# Altium PCB BigCreteCANV1.PcbDoc
Units mil, origin at the board's own origin, x right, y up, seen from the top; angles counter-clockwise.
Board outline 6000 x 4000 mil, 2 copper layers (Top Layer, Bottom Layer); 47 components, 32 nets, 163 pads, 0 vias.
Unrouted connection lines stored in the file: 100.
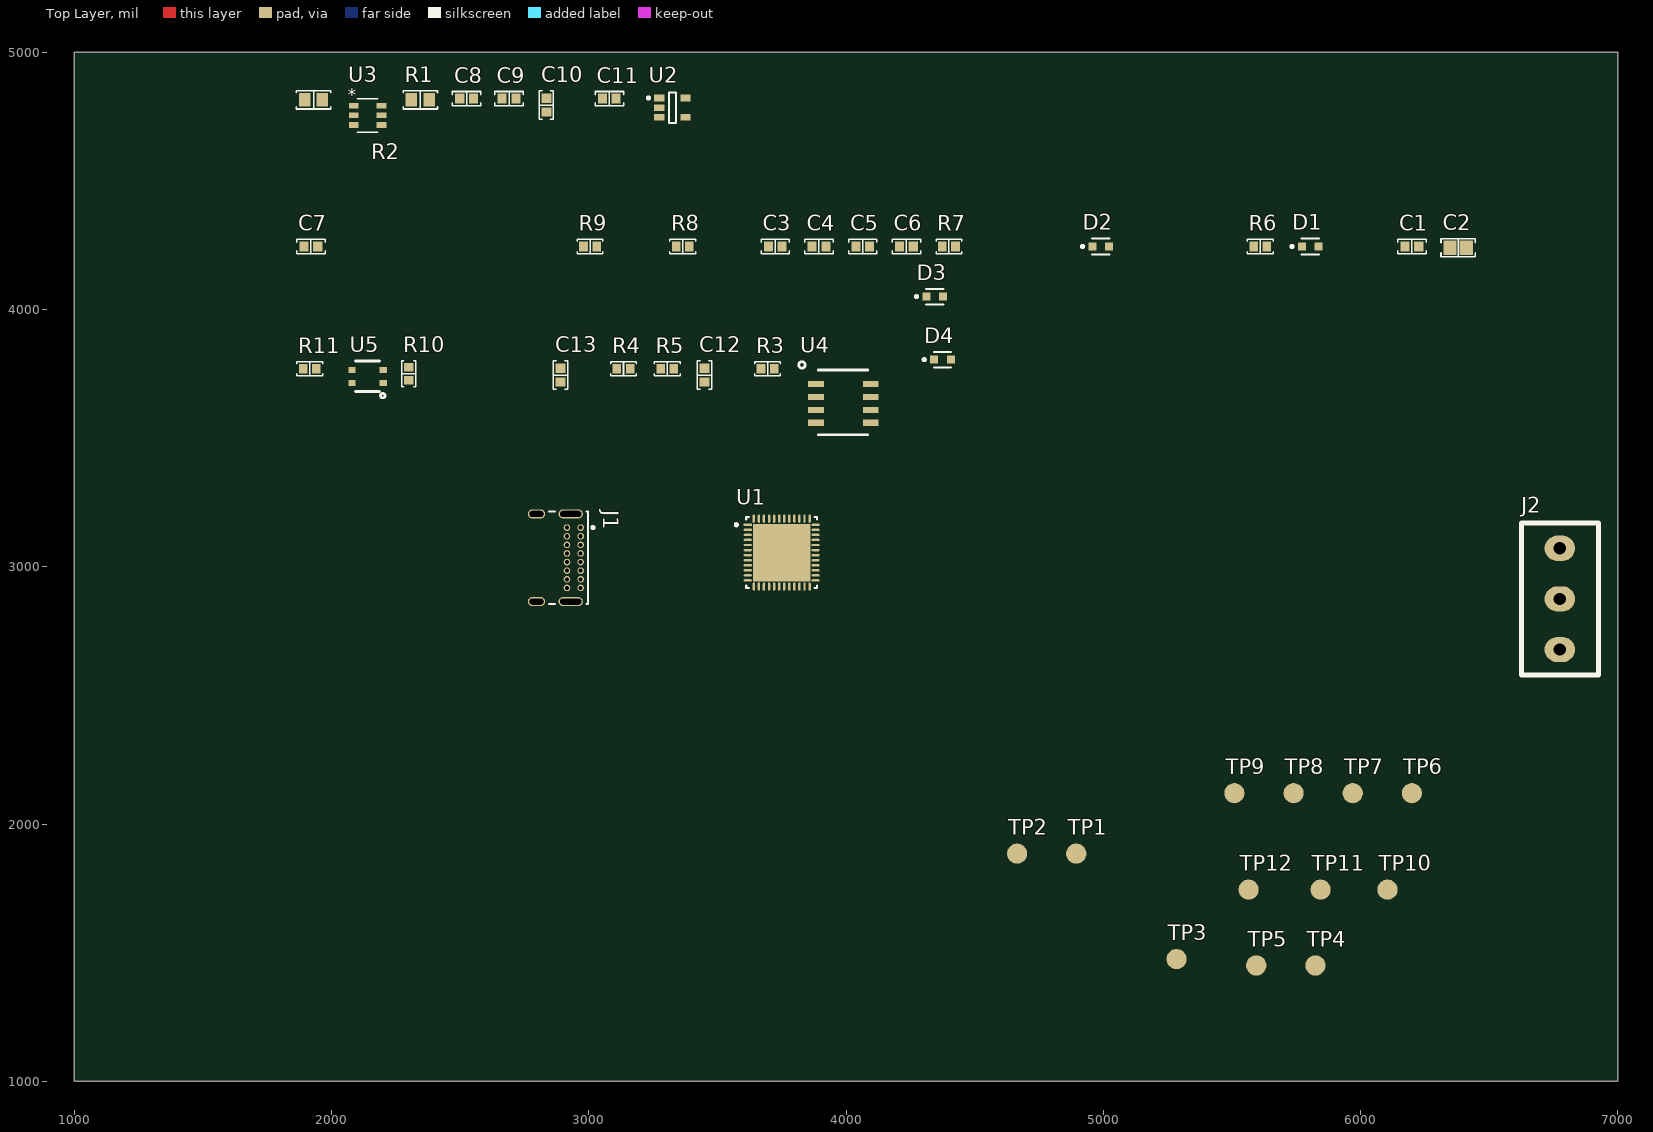
[diagram p0: Top Layer view]
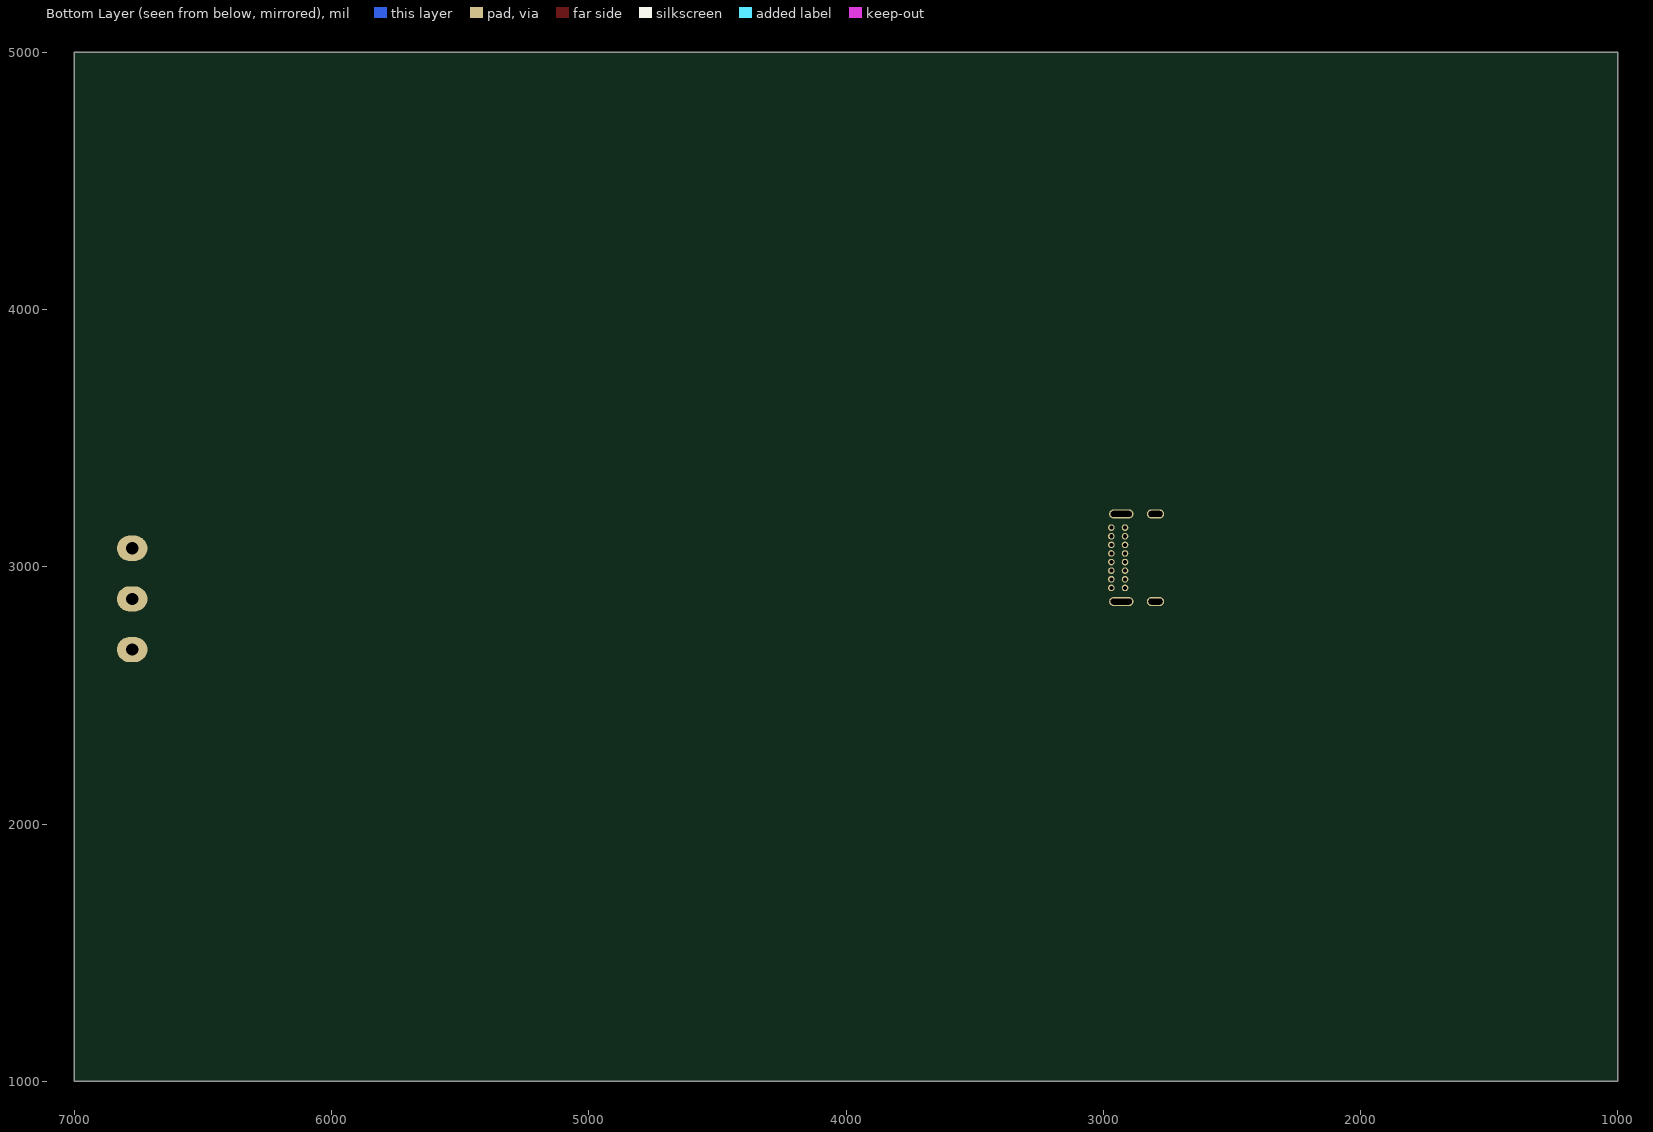
[diagram p1: Bottom Layer view, seen from below]

## Layer stack, top to bottom
Top Solder: solder mask 0.4, Solder Resist, Dk 3.5
Top Layer: signal copper 1.4
Dielectric 1: dielectric 12.6, FR-4, Dk 4.8
Bottom Layer: signal copper 1.4
Bottom Solder: solder mask 0.4, Solder Resist, Dk 3.5

## Board outline
1000,1000 7000,1000 7000,5000 1000,5000

## Design rules (kind name [scope] priority, off if disabled: settings)
Clearance [All] p1: gap=10 ignorepadtopadclearanceinfootprint=TRUE except(0: Arc-Hole Track-Hole SMDPad-Hole THPad-Hole Via-Hole Fill-Hole Poly-Hole Region-Hole Text-Hole)
PolygonConnect [All] p1: connectstyle=Relief reliefconductorwidth=10 reliefentries=4 polygonreliefangle="90 Angle" airgapwidth=10
RoutingVias [All] p1: holewidth=28 width=50 viastyle="Through Hole" minholewidth=28 minwidth=50 maxholewidth=28 maxwidth=50
SolderMaskExpansion [All] p1: expansion=4 istentingtop=FALSE
Width [All] p1: maxlimit=10 minlimit=10 preferedwidth=10
30 further rules are at their usual default settings.

## Classes and differential pairs
component class Power_Conn: C8 C9 C10 C11 J1 R1 R2 U2 U3
component class Microcontroller: C1 C2 C3 C4 C5 C6 C7 D1 D2 D3 D4 R6 R7 R8 R9 TP1 TP2 TP3 TP4 TP5 TP6 TP7 TP8 TP9 U1
component class CAN: C12 C13 J2 R3 R4 R5 R10 R11 TP10 TP11 TP12 U4 U5

## Components (designator, comment, footprint, x,y, rotation, side; value= is the part's Value field where it differs from the comment)
C1 "1 µF" "CAP 0603_1608" 6200,4245 r0 top
C2 "10 µF" "CAP 0805_2012" 6380,4240 r0 top
C3 "0.1 µF" "CAP 0603_1608" 3725,4245 r0 top
C4 "0.1 µF" "CAP 0603_1608" 3895,4245 r0 top
C5 "0.1 µF" "CAP 0603_1608" 4065,4245 r0 top
C6 "0.1 µF" "CAP 0603_1608" 4235,4245 r0 top
C7 "0.1 µF" "CAP 0603_1608" 1920,4245 r0 top
C8 "0.1 µF" "CAP 0603_1608" 2525,4820 r0 top
C9 "1 µF" "CAP 0603_1608" 2690,4820 r0 top
C10 "1 µF" "CAP 0603_1608" 2835,4795 r90 top
C11 "0.1 µF" "CAP 0603_1608" 3080,4820 r0 top
C12 "0.1 µF" "CAP 0603_1608" 3450,3745 r90 top
C13 "0.1 µF" "CAP 0603_1608" 2890,3745 r90 top
D1 "SML-D12U1WT86" FP-SML-D12-MFG 5805,4245 r0 top
D2 "SML-D12U1WT86" FP-SML-D12-MFG 4990,4245 r0 top
D3 "SML-D12U1WT86" FP-SML-D12-MFG 4345,4050 r0 top
D4 "SML-D12U1WT86" FP-SML-D12-MFG 4375,3805 r0 top
J1 "USB4085-GF-A" FP-USB4085-GF-A-MFG 2810,3035 r270 top
J2 "EBBA-03-C-SS-BU" EBBA-03-C-SS-BU 6775,2875 r90 top
R1 "5.1 kOhms" "RES 0805_2012" 2345,4815 r0 top
R2 "5.1 kOhms" "RES 0805_2012" 1930,4815 r0 top
R3 "0 Ohms" "RES 0603_1608" 3695,3770 r0 top
R4 "0 Ohms" "RES 0603_1608" 3135,3770 r0 top
R5 "0 Ohms" "RES 0603_1608" 3305,3770 r0 top
R6 "330 Ohms" "RES 0603_1608" 5610,4245 r0 top
R7 "330 Ohms" "RES 0603_1608" 4400,4245 r0 top
R8 "330 Ohms" "RES 0603_1608" 3365,4245 r0 top
R9 "330 Ohms" "RES 0603_1608" 3005,4245 r0 top
R10 "330 Ohms" "RES 0603_1608" 2300,3750 r90 top
R11 "110 Ohms" "RES 0603_1608" 1915,3770 r0 top
TP1 "test_pad" "2mm TP" 4895,1885 r0 top
TP2 "test_pad" "2mm TP" 4665,1885 r0 top
TP3 "test_pad" "2mm TP" 5285,1475 r0 top
TP4 "test_pad" "2mm TP" 5825,1450 r0 top
TP5 "test_pad" "2mm TP" 5595,1450 r0 top
TP6 "test_pad" "2mm TP" 6200,2120 r0 top
TP7 "test_pad" "2mm TP" 5970,2120 r0 top
TP8 "test_pad" "2mm TP" 5740,2120 r0 top
TP9 "test_pad" "2mm TP" 5510,2120 r0 top
TP10 "test_pad" "2mm TP" 6105,1745 r90 top
TP11 "test_pad" "2mm TP" 5845,1745 r90 top
TP12 "test_pad" "2mm TP" 5565,1745 r90 top
U1 "STM32G474CEU6" FP-UFQFPN48-A0B9-IPC_C 3750,3055 r0 top
U2 "MIC5504-3.3YM5-TR" FP-SOT23-5LD-PL-1-MFG 3325,4785 r0 top
U3 "USBLC6-2SC6" SOT23-6L_STM 2140,4755 r0 top
U4 "TCAN1057AEV" TCAN1057AEV 3990,3635 r0 top
U5 "TLP3317" TLP3317 2140,3740 r0 top

## Footprints (in the part's own frame and the unit in brackets; to place one, negate y for a bottom-side part, rotate by r counter-clockwise, add the part's x,y. Pads: shape width x height; smd on the part's side, far side on the other; paste and mask are expansions set on the pad)
"2mm TP" [mm]
  round 2 smd: 1(0,0)
"CAP 0603_1608" [mm] "Chip Capacitor, 2-Leads, Body 1.60x0.80mm, IPC Medium Density"
  rect 0.9x1 smd: 1(-0.675,0) 2(0.675,0)
  silkscreen extent -1.4,-0.7 1.4,0.7, body extent -0.8,-0.41 0.8,0.41, height 0.82
"CAP 0805_2012" [mm] "Chip Capacitor, 2-Leads, Body 2.00x1.20mm, IPC Medium Density"
  rect 1.3x1.4 smd: 1(-0.8,0) 2(0.8,0)
  silkscreen extent -1.7,-0.9 1.7,0.9, body extent -1,-0.64 1,0.64, height 1.26
EBBA-03-C-SS-BU [mm] "3 pos screw terminal"
  oval 2.5x3 hole 1.2: 1(-5,0) 2(0,0) 3(5,0)
  silkscreen extent -7.5,-3.8 7.5,3.8
FP-SML-D12-MFG [mm]
  rect 0.8x0.8 smd paste+0 mask+0: 1(-0.825,0) 2(0.825,0)
  silkscreen extent -1.92,-0.79 0.85,0.77, body extent -1.33,-0.55 1.33,0.55, height 0.25
FP-SOT23-5LD-PL-1-MFG [mm]
  rect 1x0.66 smd paste+0 mask+0: 1(-1.3,0.95) 2(-1.3,0) 3(-1.3,-0.95) 4(1.3,-0.95) 5(1.3,0.95)
  silkscreen extent -2.47,-1.5 0.35,1.5, body extent -1.9,-1.6 1.9,1.6, height 0.25
FP-UFQFPN48-A0B9-IPC_C [mm]
  rect 0.81x0.242 smd paste+0 mask+0: 1(-3.351,2.75)
  rrect100% 0.81x0.242 smd paste+0 mask+0: 2(-3.351,2.25) 3(-3.351,1.75) 4(-3.351,1.25) 5(-3.351,0.75) 6(-3.351,0.25) 7(-3.351,-0.25) 8(-3.351,-0.75) 9(-3.351,-1.25) 10(-3.351,-1.75) 11(-3.351,-2.25) 12(-3.351,-2.75) 25(3.351,-2.75) 26(3.351,-2.25) 27(3.351,-1.75) 28(3.351,-1.25) 29(3.351,-0.75) 30(3.351,-0.25) 31(3.351,0.25) 32(3.351,0.75) 33(3.351,1.25) 34(3.351,1.75) 35(3.351,2.25) 36(3.351,2.75)
  rrect100% 0.242x0.81 smd paste+0 mask+0: 13(-2.75,-3.351) 14(-2.25,-3.351) 15(-1.75,-3.351) 16(-1.25,-3.351) 17(-0.75,-3.351) 18(-0.25,-3.351) 19(0.25,-3.351) 20(0.75,-3.351) 21(1.25,-3.351) 22(1.75,-3.351) 23(2.25,-3.351) 24(2.75,-3.351) 37(2.75,3.351) 38(2.25,3.351) 39(1.75,3.351) 40(1.25,3.351) 41(0.75,3.351) 42(0.25,3.351) 43(-0.25,3.351) 44(-0.75,3.351) 45(-1.25,3.351) 46(-1.75,3.351) 47(-2.25,3.351) 48(-2.75,3.351)
  rect 5.7x5.7 smd paste-1000 mask+0: 49(0,0)
  silkscreen extent -4.61,-3.5 3.5,3.5, body extent -3.86,-3.86 3.86,3.86, height 0.25
FP-USB4085-GF-A-MFG [mm]
  rrect100% 0.9x2.4 hole 2.1 slot 0.6 at 0 deg paste-1000 mask+0: 1(-4.325,3.045) 2(4.325,3.045)
  rrect100% 0.9x1.7 hole 1.4 slot 0.6 at 0 deg paste-1000 mask+0: 3(-4.325,-0.335) 4(4.325,-0.335)
  round 0.65 hole 0.4 paste-1000 mask+0: A1(-2.975,4.025) A4(-2.125,4.025) A5(-1.275,4.025) A6(-0.425,4.025) A7(0.425,4.025) A8(1.275,4.025) A9(2.125,4.025) A12(2.975,4.025) B1(2.975,2.675) B4(2.125,2.675) B5(1.275,2.675) B6(0.425,2.675) B7(-0.425,2.675) B8(-1.275,2.675) B9(-2.125,2.675) B12(-2.975,2.675)
  silkscreen extent -4.57,0.89 4.57,5.37, body extent -4.87,-4.83 4.87,4.83, height 0.25
"RES 0603_1608" [mm] "Chip Resistor, 2-Leads, Body 1.60x0.80mm, IPC Medium Density"
  rect 0.85x0.95 smd: 1(-0.65,0) 2(0.65,0)
  silkscreen extent -1.27,-0.7 1.27,0.7, body extent -0.8,-0.4 0.8,0.4, height 0.45
"RES 0805_2012" [mm] "Chip Resistor, 2-Leads, Body 2.00x1.25mm, IPC Medium Density"
  rect 1.15x1.35 smd: 1(-0.875,0) 2(0.875,0)
  silkscreen extent -1.7,-0.9 1.7,0.9, body extent -1,-0.62 1,0.63, height 0.6
SOT23-6L_STM [mil]
  rect 38.5x22 smd paste+0 mask+0: 1(-53.75,37.4) 2(-53.75,0) 3(-53.75,-37.4) 4(53.75,-37.4) 5(53.75,0) 6(53.75,37.4)
  silkscreen extent -40,-65 40,65, body extent -59,-60 59,60, height 57
TCAN1057AEV [mm]
  rect 1.55x0.6 smd: 1(-2.7,1.905) 2(-2.7,0.635) 3(-2.7,-0.635) 4(-2.7,-1.905) 5(2.7,-1.905) 6(2.7,-0.635) 7(2.7,0.635) 8(2.7,1.905)
  silkscreen extent -4.42,-3.1 2.4,4.12
TLP3317 [mm]
  rect 0.7x0.6 smd: 1(1.55,-0.635) 2(1.55,0.635) 3(-1.55,0.635) 4(-1.55,-0.635)
  silkscreen extent -1.2,-2.12 1.72,1.5

## Part data
C1 C9 C10: library part CL10B105KP8NFNC, "CAP CER 1UF 10V X7R 0603", Device Package="0603 (1608 Metric)", Manufacturer="Samsung Electro-Mechanics", Operating Temperature="-55°C ~ 125°C", Supplier Part Number 1=1276-1945-1-ND, Temperature Coefficient=X7R, Tolerance=±10%, Voltage - Rated=10V, Applications="General Purpose", Capacitance="1 µF", ComponentLink1Description=Datasheet, ComponentLink1URL=http://www.samsungsem.com/kr/support/product-search/mlcc/CL10B105KP8NFNC.jsp, ComponentLink2Description="DigiKey Link", ComponentLink2URL=https://www.digikey.com/en/products/detail/samsung-electro-mechanics/CL10B105KP8NFNC/3887603, LastUpdated="2023-11-08 8:08:57 PM", Lifecycle Status=Active, Minimum Order=1, Mounting Type="Surface Mount, MLCC", Package / Case="0603 (1608 Metric)", Packaging=TapeAndReel, Part Number=CL10B105KP8NFNC, Part Status=Active, PartId=10019, Price=0.01, Series=CL, Size / Dimension="0.063\" L x 0.031\" W (1.60mm x 0.80mm)", Supplier 1=DigiKey, Thickness (Max)="0.035\" (0.90mm)"
C2: library part CL21A106KOQNNNE, "CAP CER 10UF 16V X5R 0805", Device Package="0805 (2012 Metric)", Manufacturer="Samsung Electro-Mechanics", Operating Temperature="-55°C ~ 85°C", Supplier Part Number 1=1276-1096-1-ND, Temperature Coefficient=X5R, Tolerance=±10%, Voltage - Rated=16V, Applications="General Purpose", Capacitance="10 µF", ComponentLink1Description=Datasheet, ComponentLink1URL=http://www.samsungsem.com/kr/support/product-search/mlcc/CL21A106KOQNNNE.jsp, ComponentLink2Description="DigiKey Link", ComponentLink2URL=https://www.digikey.com/en/products/detail/samsung-electro-mechanics/CL21A106KOQNNNE/3886754, LastUpdated="2023-11-08 8:12:18 PM", Lifecycle Status=Active, Minimum Order=1, Mounting Type="Surface Mount, MLCC", Package / Case="0805 (2012 Metric)", Packaging=TapeAndReel, Part Number=CL21A106KOQNNNE, Part Status=Active, PartId=14297, Price=0.01, Series=CL, Size / Dimension="0.079\" L x 0.049\" W (2.00mm x 1.25mm)", Supplier 1=DigiKey, Thickness (Max)="0.055\" (1.40mm)"
C3 C4 C5 C6 C7 C8 C11 C12 C13: library part CL10B104KB8NNNC, "CAP CER 0.1UF 50V X7R 0603", Device Package="0603 (1608 Metric)", Manufacturer="Samsung Electro-Mechanics", Operating Temperature="-55°C ~ 125°C", Supplier Part Number 1=1276-1000-1-ND, Temperature Coefficient=X7R, Tolerance=±10%, Voltage - Rated=50V, Applications="General Purpose", Capacitance="0.1 µF", ComponentLink1Description=Datasheet, ComponentLink1URL=http://www.samsungsem.com/kr/support/product-search/mlcc/CL10B104KB8NNNC.jsp, ComponentLink2Description="DigiKey Link", ComponentLink2URL=https://www.digikey.com/en/products/detail/samsung-electro-mechanics/CL10B104KB8NNNC/3886658, LastUpdated="2023-11-08 8:08:57 PM", Lifecycle Status=Active, Minimum Order=1, Mounting Type="Surface Mount, MLCC", Package / Case="0603 (1608 Metric)", Packaging=TapeAndReel, Part Number=CL10B104KB8NNNC, Part Status=Active, PartId=9788, Price=0.01, Series=CL, Size / Dimension="0.063\" L x 0.031\" W (1.60mm x 0.80mm)", Supplier 1=DigiKey, Thickness (Max)="0.035\" (0.90mm)"
D1 D2 D3 D4: library part CMP-08952-000009-1, "LED RED DIFFUSED 1608 SMD", Colour=Red, Forward Current=20mA, Forward Voltage=2.2V, Manufacturer=Rohm, Package=SML-D12, Power Dissipation=54mW, Reverse Voltage=5V, Temperature="-40°C to +85°C", Temperature Range High=+85°C, Temperature Range Low=-40°C, Automotive=No, Category=Diode, ComponentLink2Description=Datasheet, ComponentLink2URL=https://www.rohm.com/datasheet/SML-D12U1W/sml-d12x1-e, Device Class L1=Optoelectronics, Device Class L2=LEDs, Device Class L3=unset, Digikey Description="LED RED DIFFUSED 1608 SMD", Height=0.65mm, Lead Free=Yes, Led Orientation="Top View", Luminous Intensity=63mcd, Manufacturer Part Number=SML-D12U1WT86, Mouser Description="SML-D12 Series Red 0603 Diffused 63 mcd 2.2 V Surface Mount LED", Octopart=https://octopart.com/sml-d12u1wt86-rohm-70850259, RoHS=TRUE, Wavelength=620nm
J1: library part CMP-196119-000001-2, "CONN RCPT USB2.0 TYPE C 24POS RA", Contact Material="Copper Alloy", Contact Plating=Gold, Gender=Receptacle, Number of Positions=16, Orientation="Right Angle", USB Standard="USB 2.0"
J2: "Screw Terminal"
R1 R2: library part RC0805JR-075K1L, "RES 5.1K OHM 5% 1/8W 0805", Device Package="0805 (2012 Metric)", Manufacturer=Yageo, Operating Temperature="-55°C ~ 155°C", Power (Watts)="0.125W, 1/8W", Supplier Device Package=0805, Supplier Part Number 1=311-5.1KARCT-ND, Temperature Coefficient=±100ppm/°C, Tolerance=±5%, ComponentLink1Description=Datasheet, ComponentLink1URL=https://www.yageo.com/upload/media/product/productsearch/datasheet/rchip/PYu-RC_Group_51_RoHS_L_10.pdf, ComponentLink2Description="DigiKey Link", ComponentLink2URL=https://www.digikey.com/en/products/detail/yageo/RC0805JR-075K1L/728338, Composition="Thick Film", Features="Moisture Resistant", Height - Seated (Max)="0.024\" (0.60mm)", LastUpdated="2023-01-02 8:43:52 PM", Lifecycle Status=Active, Minimum Order=1, Number of Terminations=2, Package / Case="0805 (2012 Metric)", Packaging=CutTape, Part Number=RC0805JR-075K1L, Part Status=Active, PartId=41971, Price=0.01, Resistance="5.1 kOhms", Series=RC_L, Size / Dimension="0.079\" L x 0.049\" W (2.00mm x 1.25mm)", Supplier 1=DigiKey
R3 R4 R5: library part RMCF0603ZT0R00, "RES 0 OHM JUMPER 1/10W 0603", Device Package="0603 (1608 Metric)", Manufacturer="Stackpole Electronics Inc", Operating Temperature="-55°C ~ 155°C", Power (Watts)="0.1W, 1/10W", Ratings=AEC-Q200, Supplier Device Package=0603, Supplier Part Number 1=RMCF0603ZT0R00CT-ND, Tolerance=Jumper, ComponentLink1Description=Datasheet, ComponentLink1URL=https://www.seielect.com/catalog/sei-rmcf_rmcp.pdf, ComponentLink2Description="DigiKey Link", ComponentLink2URL=https://www.digikey.com/en/products/detail/stackpole-electronics-inc/RMCF0603ZT0R00/1756908, Composition="Thick Film", Features="Automotive AEC-Q200", Height - Seated (Max)="0.022\" (0.55mm)", LastUpdated="2023-11-08 8:34:48 PM", Lifecycle Status=Active, Minimum Order=1, Number of Terminations=2, Package / Case="0603 (1608 Metric)", Packaging=CutTape, Part Number=RMCF0603ZT0R00, Part Status=Active, PartId=22613, Price=0.01, Resistance="0 Ohms", Series=RMCF, Size / Dimension="0.061\" L x 0.031\" W (1.55mm x 0.80mm)", Supplier 1=DigiKey
R6 R7 R8 R9 R10: library part CR0603-JW-331ELF, "RES SMD 330 OHM 5% 1/10W 0603", Device Package="0603 (1608 Metric)", Manufacturer="Bourns Inc.", Operating Temperature="-55°C ~ 155°C", Power (Watts)="0.1W, 1/10W", Supplier Device Package=0603, Supplier Part Number 1=CR0603-JW-331ELFCT-ND, Temperature Coefficient=±200ppm/°C, Tolerance=±5%, ComponentLink1Description=Datasheet, ComponentLink1URL=https://www.bourns.com/docs/Product-Datasheets/CHPREZTR.pdf, ComponentLink2Description="DigiKey Link", ComponentLink2URL=https://www.digikey.com/en/products/detail/bourns-inc/CR0603-JW-331ELF/2345095, Composition="Thick Film", Features="Moisture Resistant", Height - Seated (Max)="0.022\" (0.55mm)", LastUpdated="2023-11-08 8:34:22 PM", Lifecycle Status=Active, Minimum Order=1, Number of Terminations=2, Package / Case="0603 (1608 Metric)", Packaging=CutTape, Part Number=CR0603-JW-331ELF, Part Status=Active, PartId=25660, Price=0.01, Resistance="330 Ohms", Series=CR0603, Size / Dimension="0.063\" L x 0.031\" W (1.60mm x 0.80mm)", Supplier 1=DigiKey
R11: library part RMCF0603FT110R, "RES 110 OHM 1% 1/10W 0603", Device Package="0603 (1608 Metric)", Manufacturer="Stackpole Electronics Inc", Operating Temperature="-55°C ~ 155°C", Power (Watts)="0.1W, 1/10W", Ratings=AEC-Q200, Supplier Device Package=0603, Supplier Part Number 1=RMCF0603FT110RCT-ND, Temperature Coefficient=±100ppm/°C, Tolerance=±1%, ComponentLink1Description=Datasheet, ComponentLink1URL=https://www.seielect.com/catalog/sei-packaging.pdf, ComponentLink2Description="DigiKey Link", ComponentLink2URL=https://www.digikey.com/en/products/detail/stackpole-electronics-inc/RMCF0603FT110R/1761268, Composition="Thick Film", Features="Automotive AEC-Q200", Height - Seated (Max)="0.022\" (0.55mm)", LastUpdated="2023-11-08 8:35:50 PM", Lifecycle Status=Active, Minimum Order=1, Number of Terminations=2, Package / Case="0603 (1608 Metric)", Packaging=CutTape, Part Number=RMCF0603FT110R, Part Status=Active, PartId=6924, Price=0.01, Resistance="110 Ohms", Series=RMCF, Size / Dimension="0.061\" L x 0.031\" W (1.55mm x 0.80mm)", Supplier 1=DigiKey
TP1 TP2 TP3 TP4 TP5 TP6 TP7 TP8 TP9 TP10 TP11 TP12: "Test pad for ICT"
U1: library part CMP-12105-000082-1, "MAINSTREAM ARM CORTEX-M4 CORE WI"
U2: library part CMP-2000-07604-2, "IC REG LINEAR 3.3V 300MA SOT23-5", Case/Package=SOT-23-5, Dropout Voltage=380mV, Max Input Voltage=5.5V, Max Operating Temperature=125°C, Max Output Current=300mA, Min Input Voltage=2.5V, Min Operating Temperature=-40°C, Nominal Output Voltage=3.3V, Operating Supply Current=42uA, Power Supply Rejection Ratio (PSRR)=60dB, Quiescent Current=38uA, Accuracy=3%, Height=1.1mm, Length=2.9mm, Mount="Surface Mount", Number of Outputs=1, Number of Pins=5, Output Current=300mA, Output Type=Fixed, Output Voltage=3.3V, Packaging="Tape and Reel", REACH SVHC="No SVHC", Width=1.6mm
U3: "No Description Available", Mfr_Name=STMicroelectronics, Copyright="Copyright (C) 2023 Ultra Librarian. All rights reserved.", Manufacturer_Part_Number=USBLC6-2SC6, RefDes=RefDes, Type=DEV

## Nets (pads, with @x,y where several pads share a name; then routed paths per layer and width w, separated by ;. In a path a pad name is that pad's centre, name@x,y a point inside that pad or via, vN(x,y) a via of type N, cw(c..) or ccw(c..) an arc to the next point about the centre after c; other vN are vias at no path point)
3v3: C1.2 C2.2 C3.2 C4.2 C5.2 C6.2 C10.2 C11.2 R3.2 R5.1 R10.2 TP4.1 U1.20 U1.21 U1.23 U1.35 U1.48 U2.5
+5: C8.2 C9.2 J1.A4 J1.A9 J1.B4 J1.B9 R4.1 U2.1 U2.3 U3.5
CAN_H: J2.3 R11.1 TP10.1 U4.7
CAN_L: J2.2 TP11.1 U4.6 U5.3
CAN_RX: U1.25 U4.4
CAN_STB: TP12.1 U1.24 U4.8
CAN_TERM: U1.27 U5.2
CAN_TX: U1.26 U4.1
D+: J1.A6 J1.B6 U3.4
D-: J1.A7 J1.B7 U3.6
DBG_RX: TP7.1 U1.11
DBG_TX: TP6.1 U1.10
GND: C1.1 C2.1 C3.1 C4.1 C5.1 C6.1 C7.1 C8.1 C9.1 C10.1 C11.1 C12.1 C13.1 J1.1 J1.2 J1.3 J1.4 J1.A1 J1.A12 J1.B1 J1.B12 J2.1 R1.2 R2.2 R6.1 R7.1 R8.1 R9.1 TP5.1 U1.49 U2.2 U3.2 U4.2
LED_CAN_RX: D2.2 U1.42
LED_CAN_TX: D1.2 U1.41
LED_COM: D4.2 U1.44
LED_PWR: D3.2 U1.43
NetC12_2: C12.2 R4.2 R5.2 U4.3
NetC13_2: C13.2 R3.1 U4.5
NetD1_1: D1.1 R6.2
NetD2_1: D2.1 R7.2
NetD3_1: D3.1 R8.2
NetD4_1: D4.1 R9.2
NetJ1_A5: J1.A5 R1.1
NetJ1_B5: J1.B5 R2.1
NetR10_1: R10.1 U5.1
NetR11_2: R11.2 U5.4
NRST: C7.2 TP3.1 U1.7
SWCLK: TP1.1 U1.37
SWDIO: TP2.1 U1.36
USB_N: TP8.1 U1.33 U3.1
USB_P: TP9.1 U1.34 U3.3
pads on no net: J1.A8 J1.B8 U1.1 U1.2 U1.3 U1.4 U1.5 U1.6 U1.8 U1.9 U1.12 U1.13 U1.14 U1.15 U1.16 U1.17 U1.18 U1.19 U1.22 U1.28 U1.29 U1.30 U1.31 U1.32 U1.38 U1.39 U1.40 U1.45 U1.46 U1.47 U2.4

## Text inside footprints (layer, text, board x,y; h text height)
U3: Top Overlay "*" at 2063.75,4809.4 h50; Mechanical 13 "*" at 2108,4762 h50